# Altium PCB MB102_Upgrade.PcbDoc (part 1 of 2)
Units mil, origin at the board's own origin, x right, y up, seen from the top; angles counter-clockwise.
Board outline 2090.55 x 1299.23 mil, 2 copper layers (Top Layer, Bottom Layer), stack 65.792 mil thick; 81 components, 43 nets, 229 pads, 117 vias.
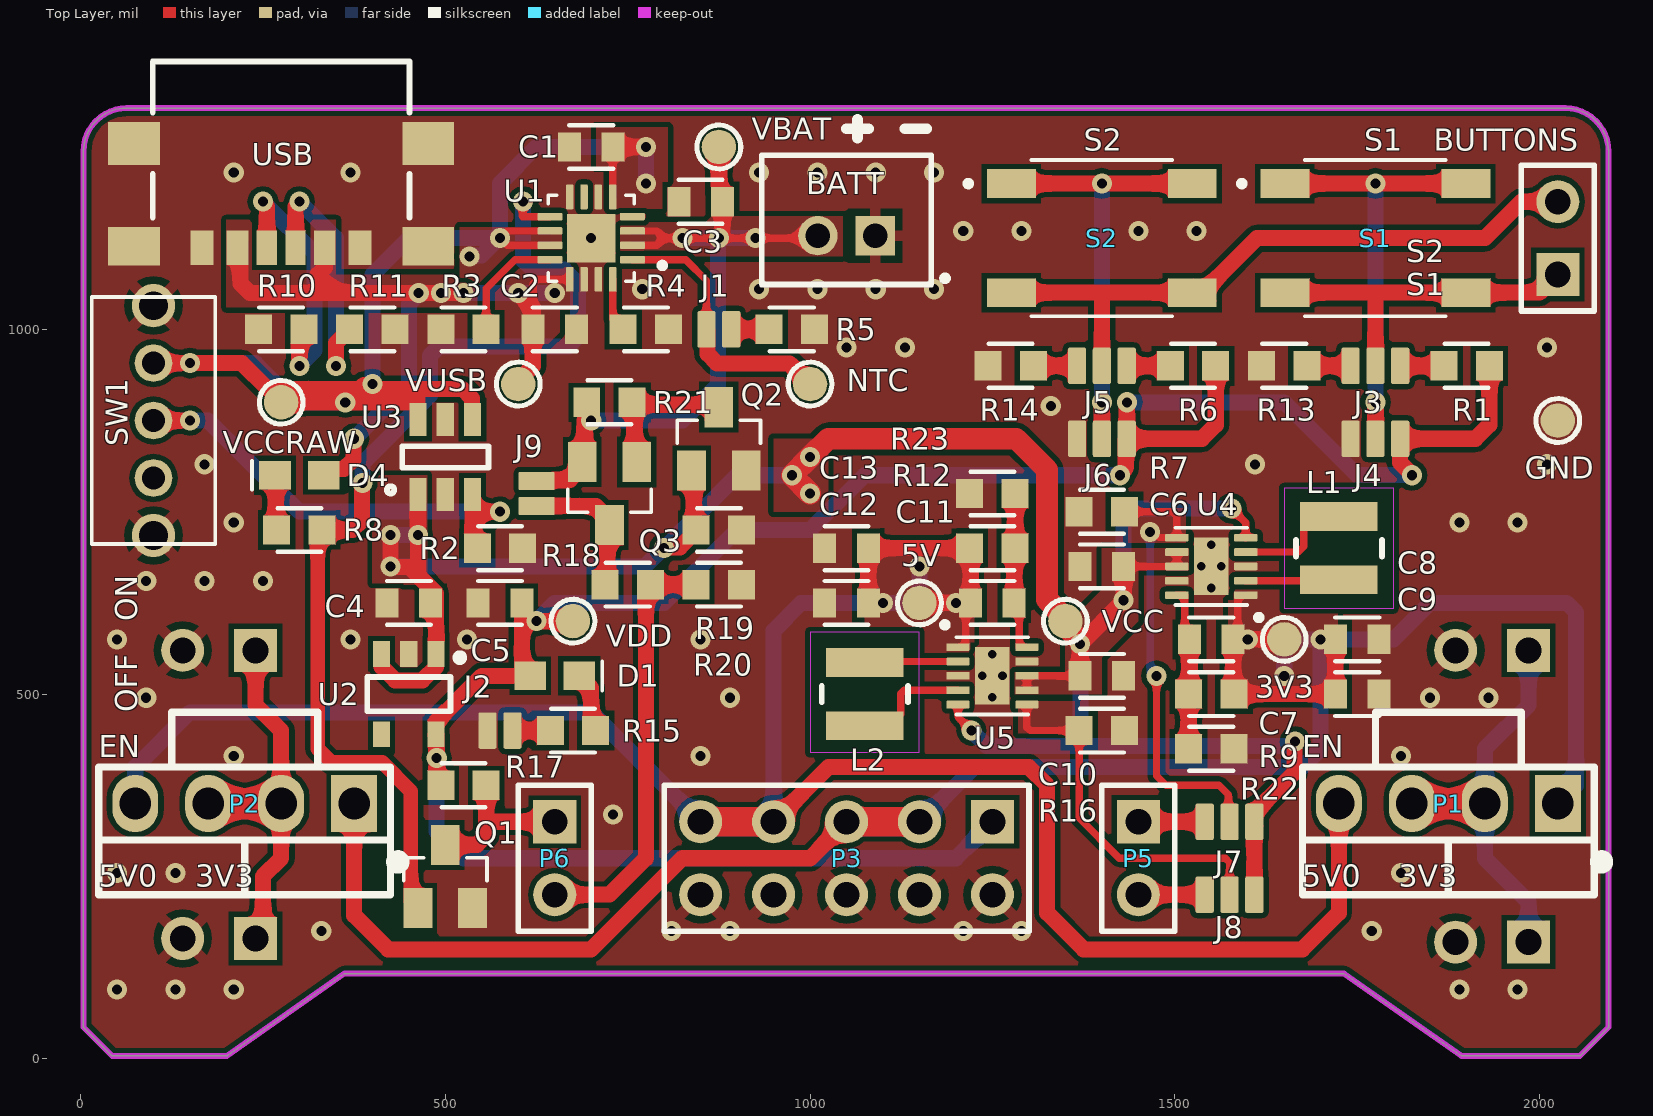
[diagram p0: Top Layer view]
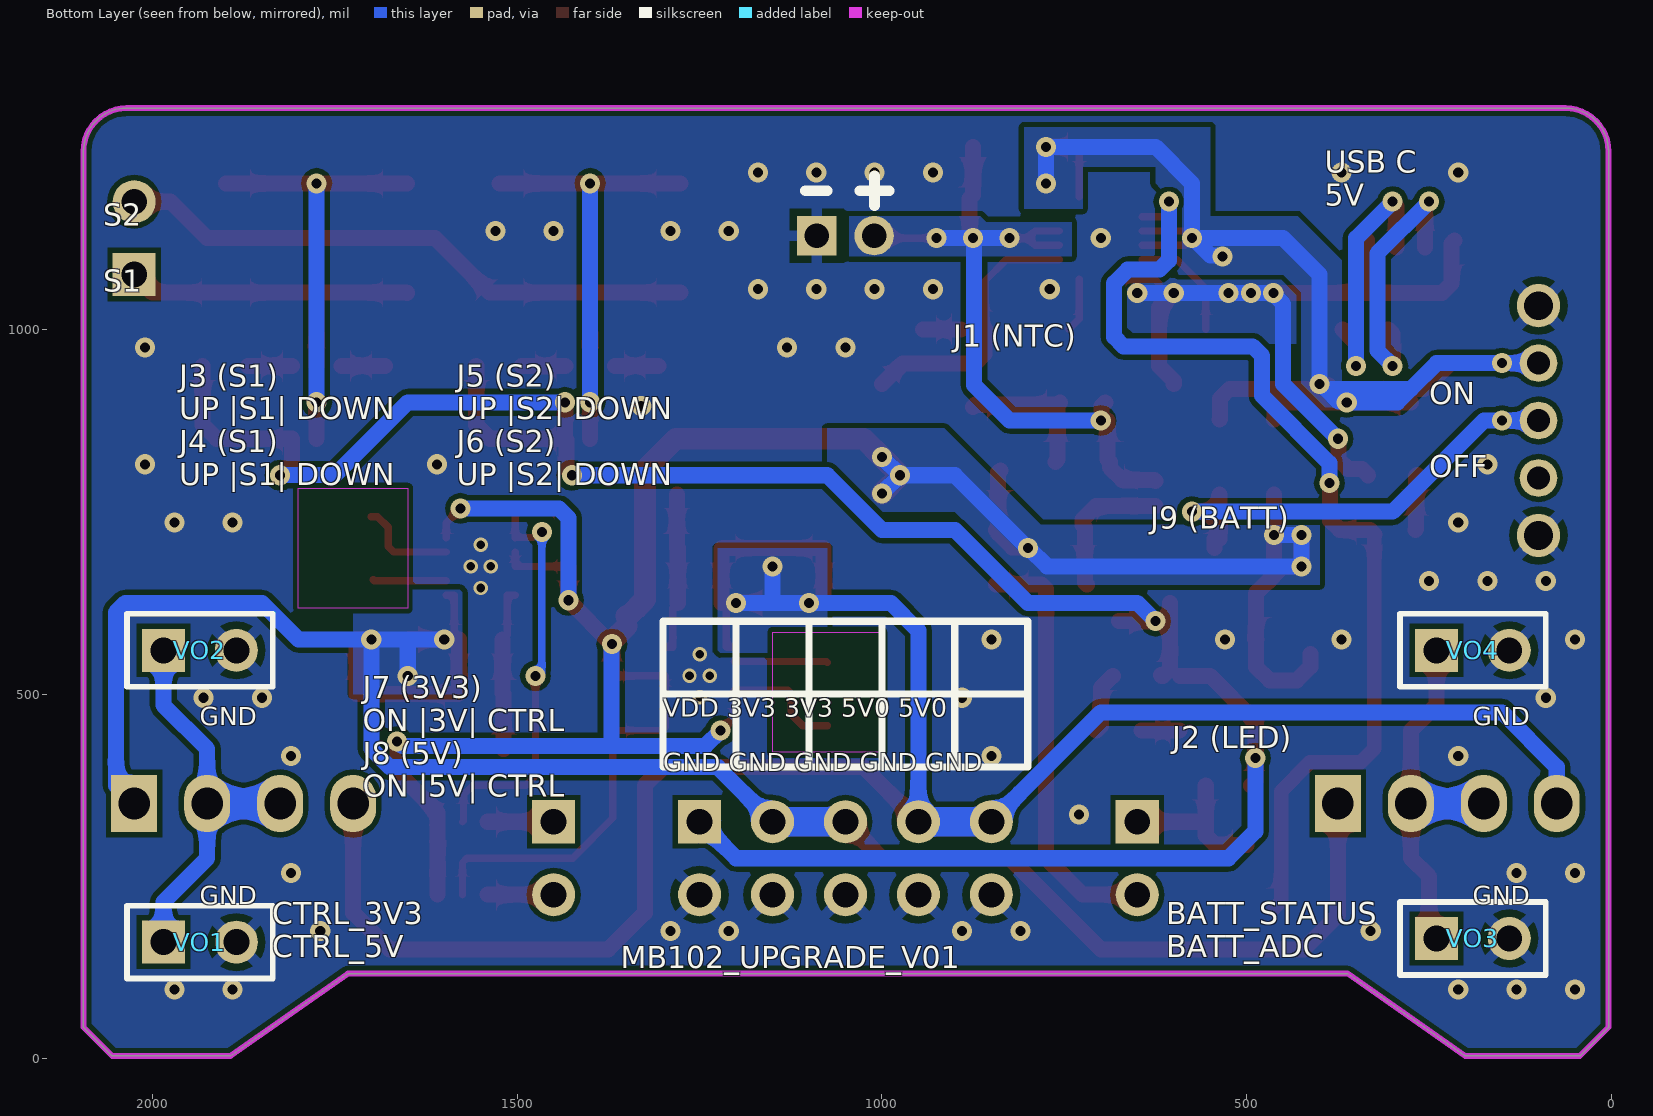
[diagram p1: Bottom Layer view, seen from below]
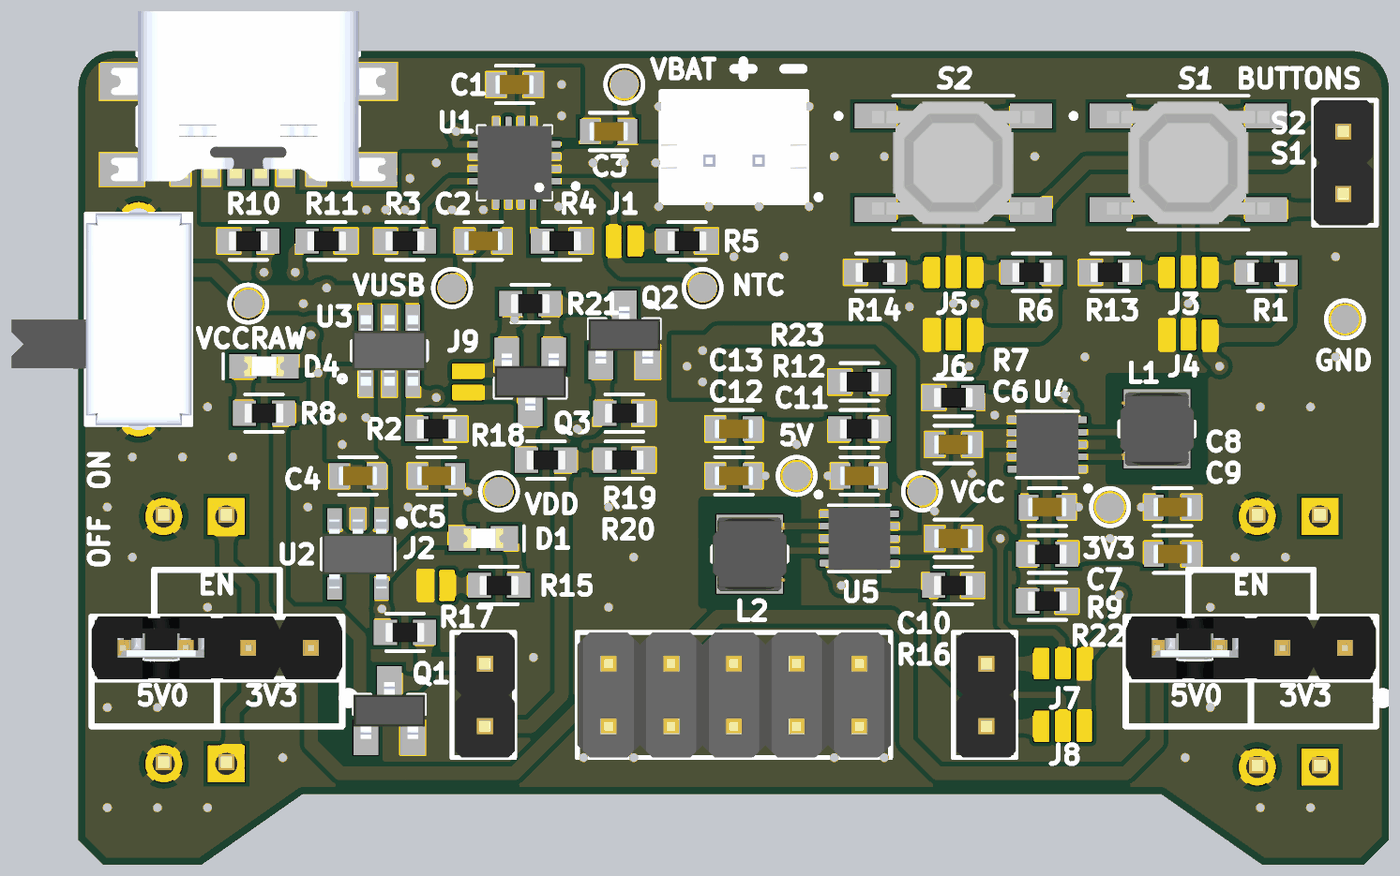
[diagram p2: 3D render of the assembled board from above, using the file's embedded part models]
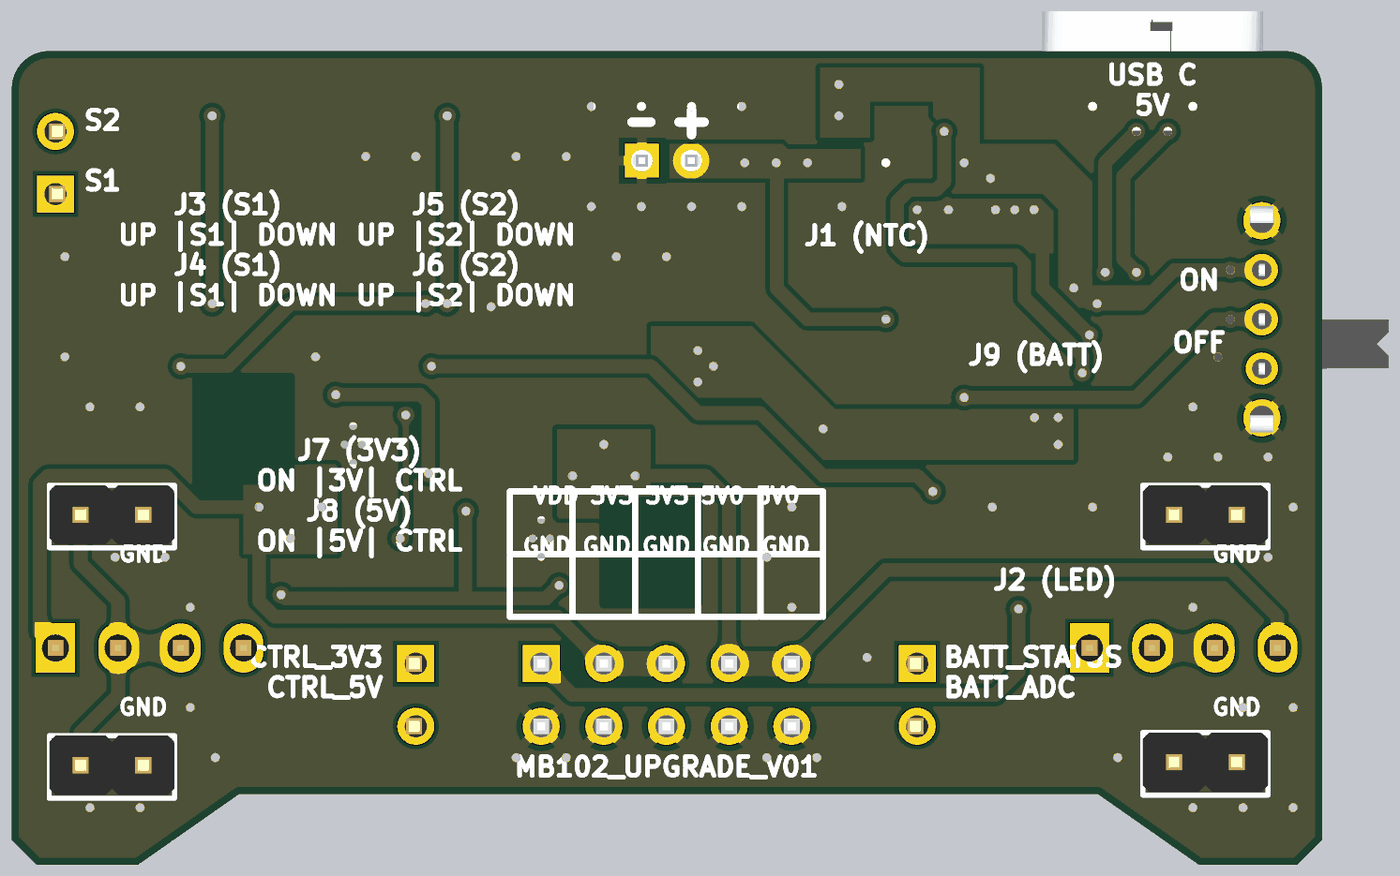
[diagram p3: 3D render of the assembled board from below, using the file's embedded part models]

## Layer stack, top to bottom
Top Solder: solder mask 0.4, Solder Resist, Dk 3.5
Top Layer: signal copper 1.4
Dielectric 1: dielectric 62.9921, FR-4, Dk 4.8
Bottom Layer: signal copper 1.4
Bottom Solder: solder mask 0.4, Solder Resist, Dk 3.5

## Board outline
4,43.37 43.37,4 200.43,4 361.68,116.91 1731.86,116.91 1893.11,4 2055.18,4 2094.55,43.37 2094.55,1244.17 ccw(c2035.5,1244.18) 2035.51,1303.23 63.07,1303.21 ccw(c63.06,1244.17) 4.02,1244.17

## Design rules (kind name [scope] priority, off if disabled: settings)
Clearance Clearance_RF [InNetClass('RF')] p1: gap=6 ignorepadtopadclearanceinfootprint=TRUE
Clearance [All] p2: gap=7 ignorepadtopadclearanceinfootprint=TRUE
HoleSize [All] p1: absolutevalues=TRUE maxlimit=200 minlimit=1 maxpercent=80.000 minpercent=20.000
MinimumSolderMaskSliver [All] p1: minsoldermaskwidth=2
PolygonConnect GND_Planes [InNet('GND') vs (InNet('GND') OR InNet('GND'))] p1: thpad.connectstyle=Relief thpad.reliefconductorwidth=15 thpad.reliefentries=4 thpad.polygonreliefangle="90 Angle" thpad.airgapwidth=10 thpad.conductorbypadedge=TRUE thpad.mindistance=15 thpad.enablemindistance=FALSE smdpad.connectstyle=Direct smdpad.reliefconductorwidth=20 smdpad.reliefentries=4 smdpad.polygonreliefangle="90 Angle" smdpad.airgapwidth=10 via.connectstyle=Direct via.reliefconductorwidth=10 via.reliefentries=4 via.polygonreliefangle="90 Angle" via.airgapwidth=10
PolygonConnect [All] p2: connectstyle=Direct reliefconductorwidth=10 reliefentries=4 polygonreliefangle="90 Angle" airgapwidth=10
RoutingVias [All] p1: holewidth=13.78 width=27.56 viastyle="Through Hole" minholewidth=11.81 minwidth=25.59 maxholewidth=19.68 maxwidth=33.46
ShortCircuit "Schematic Short-Circuit Constraint_2" [InComponent('J9')] p1: allowed=TRUE
ShortCircuit "Schematic Short-Circuit Constraint_1" [InComponent('J2')] p2: allowed=TRUE
ShortCircuit "Schematic Short-Circuit Constraint" [InComponent('J1')] p3: allowed=TRUE
ShortCircuit [All] p4: allowed=FALSE
SilkToSilkClearance [All] p1: silktosilkclearance=1
SilkToSolderMaskClearance [IsPad] p1: minsilkscreentomaskgap=1 clearancetoexposedcopper=TRUE
SolderMaskExpansion [All] p1: expansion=2 istentingtop=FALSE
Width Width_RF [InNetClass('RF')] p1: maxlimit=38 minlimit=8 preferedwidth=38
Width [All] p2: maxlimit=40 minlimit=8 preferedwidth=10
25 further rules are at their usual default settings.

## Classes and differential pairs
component class SwitchingRegulators: 3V3 5V C6 C7 C8 C9 C10 C11 C12 C13 J7 J8 L1 L2 R2 R7 R9 R12 R16 R22 R23 SW1 U3 U4 U5 VCC
component class PowerSchematic: BATT C1 C2 C3 C4 C5 D1 D4 GND J1 J2 J3 J4 J5 J6 J9 NTC Q1 Q2 Q3 R1 R3 R4 R5 R6 R8 R10 R11 R13 R14 R15 R17 R18 R19 R20 R21 S1 S2 U1 U2 USB VBAT VCCRAW VDD VUSB
component class Peripherals: P1 P2 P3 P5 P6 VO1 VO2 VO3 VO4

## Components (designator, comment, footprint, x,y, rotation, side; value= is the part's Value field where it differs from the comment)
3V3 "Test point 1.2mm" TEST_POINT_1.2MM 1650,575 r0 top
5V "Test point 1.2mm" TEST_POINT_1.2MM 1150,625 r0 top
BATT "JST-PH 2-Pin" JST_B2B-PH-K-S(LF)(SN) 1050,1150 r0 top locked
BUTTONS "Header 2" HDR1X2 2025,1075 r90 top
C1 "4.7uF/16V" C0603 700,1250 r180 top value=4.7uF
C2 "1uF/16V" C0603 650,1000 r0 top
C3 "4.7uF/16V" C0603 850,1175 r180 top value=4.7uF
C4 "10uF/10V" C0603 450,625 r180 top
C5 "10uF/10V" C0603 575,625 r180 top
C6 "4.7uF/16V" C0603 1400,675 r180 top value=4.7uF
C7 "100pF/50V" C0603 1550,575 r180 top
C8 "10uF/16V" C0603 1750,575 r0 top
C9 "4.7uF/16V" C0603 1750,500 r0 top value=4.7uF
C10 "4.7uF/16V" C0603 1400,525 r0 top value=4.7uF
C11 "100pF/50V" C0603 1250,625 r0 top
C12 "10uF/16V" C0603 1050,625 r180 top
C13 "4.7uF/16V" C0603 1050,700 r180 top value=4.7uF
D1 "RED" "LED 0603" 650,525 r0 top
D4 "GREEN" "LED 0603" 300,800 r180 top
GND "Test point 1.2mm" TEST_POINT_1.2MM 2025,875 r0 top
J1 "SMD NO" JUMPER_SMD_NO 875,1000 r0 top net-tie
J2 "SMD NO" JUMPER_SMD_NO 575,450 r180 top net-tie
J3 "SMD NO" JUMPER_SMD_NO_2WAY 1775,950 r0 top net-tie
J4 "SMD NO" JUMPER_SMD_NO_2WAY 1775,850 r0 top net-tie
J5 "SMD NO" JUMPER_SMD_NO_2WAY 1400,950 r0 top net-tie
J6 "SMD NO" JUMPER_SMD_NO_2WAY 1400,850 r0 top net-tie
J7 "SMD NO" JUMPER_SMD_NO_2WAY 1575,325 r0 top net-tie
J8 "SMD NO" JUMPER_SMD_NO_2WAY 1575,225 r0 top net-tie
J9 "SMD NO" JUMPER_SMD_NO 625,775 r270 top net-tie
L1 "1.5uH/1.7A" L3030_SHIELD_H15 1725,700 r270 top
L2 "1.5uH/1.7A" L3030_SHIELD_H15 1075,500 r90 top
NTC "Test point 1.2mm" TEST_POINT_1.2MM 1000,925 r0 top
P1 "Header Male 1x04 Jumper" "Header 1x04 Jumper" 1875,350 r270 top
P2 "Header Male 1x04 Jumper" "Header 1x04 Jumper" 225,350 r270 top
P3 "Header 5X2" HDR2X5 1250,325 r180 top locked
P5 "Header 2" HDR1X2 1450,325 r270 top locked
P6 "Header 2" HDR1X2 650,325 r270 top locked
Q1 "300mA/60V" SOT-23-3 500,250 r0 top
Q2 "300mA/60V" SOT-23-3 875,850 r0 top
Q3 "5A/30V/2.5V" SOT-23-3 725,775 r180 top
R1 "100K" R0603 1900,950 r0 top
R2 "1M" R0603 575,700 r180 top
R3 "1.2K" R0603 525,1000 r0 top
R4 "1.5K" R0603 775,1000 r180 top
R5 "10K" R0603 975,1000 r180 top value=10kR
R6 "100K" R0603 1525,950 r0 top
R7 "100K" R0603 1400,750 r0 top
R8 "1.2K" R0603 300,725 r180 top
R9 "220K" R0603 1550,500 r0 top
R10 "5.1K" R0603 275,1000 r0 top
R11 "5.1K" R0603 400,1000 r180 top
R12 "220K" R0603 1250,700 r180 top
R13 "100K" R0603 1650,950 r0 top
R14 "100K" R0603 1275,950 r0 top
R15 "1.2K" R0603 675,450 r0 top
R16 "100K" R0603 1400,450 r180 top
R17 "100K" R0603 525,375 r180 top
R18 "510K" R0603 750,650 r180 top
R19 "100K" R0603 875,725 r180 top
R20 "510K" R0603 875,650 r180 top
R21 "10K" R0603 725,900 r180 top value=10kR
R22 "1M" R0603 1550,425 r180 top
R23 "2M" R0603 1250,775 r0 top
S1 "8-1437565-1" SW_8-1437565-1 1775,1125 r0 top locked
S2 "8-1437565-1" SW_8-1437565-1 1400,1125 r0 top locked
SW1 "1825232-1" 1825232-1 100,875 r270 top locked
U1 "BQ24075RGTR" VQFN16 700,1125 r180 top locked
U2 "AP2112K-3.3TRG1" SOT-25-5 450,500 r270 top locked
U3 "AP2281-1WG-7" SOT-26-6 500,825 r90 top locked
U4 "TPS63030" WSON-N10 1550,675 r180 top
U5 "TPS63030" WSON-N10 1250,525 r0 top
USB "USB4135-GF-A_REVA" "GCT_USB4135 16-pin" 275,1255 r180 top locked
VBAT "Test point 1.2mm" TEST_POINT_1.2MM 875,1250 r0 top
VCC "Test point 1.2mm" TEST_POINT_1.2MM 1350,600 r0 top
VCCRAW "Test point 1.2mm" TEST_POINT_1.2MM 275,900 r90 top
VDD "Test point 1.2mm" TEST_POINT_1.2MM 675,600 r0 top
VO1 "Header 2" HDR1X2 1985,160 r180 bottom locked
VO2 "Header 2" HDR1X2 1985,560 r180 bottom locked
VO3 "Header 2" HDR1X2 240,165 r180 bottom locked
VO4 "Header 2" HDR1X2 240,560 r180 bottom locked
VUSB "Test point 1.2mm" TEST_POINT_1.2MM 600,925 r0 top

## Footprints (in the part's own frame and the unit in brackets; to place one, negate y for a bottom-side part, rotate by r counter-clockwise, add the part's x,y. Pads: shape width x height; smd on the part's side, far side on the other; paste and mask are expansions set on the pad)
1825232-1 [mm]
  round 1.308 hole 0.8: 1(-2,0) 2(0,0) 3(2,0)
  round 1.508 hole 1: MH1(-4,0) MH2(4,0)
  silkscreen extent -4.3,-2.15 4.3,2.15, body extent -4.59,-5.15 4.59,2.15, height 3.5
C0603 [mm]
  rect 0.8x1.02 smd: 1(-0.759,0) 2(0.759,0)
  silkscreen extent -0.76,-0.76 0.76,0.76, body extent -0.8,-0.4 0.8,0.4, height 0.81
"GCT_USB4135 16-pin" [mm]
  rect 0.7x1.2 smd: A5(-0.5,3.635) B5(0.5,3.635)
  rect 0.76x1.2 smd: A9(1.52,3.635) B9(-1.52,3.635)
  rect 0.8x1.2 smd: A12(2.75,3.635) B12(-2.75,3.635)
  rect 1.8x1.35 smd: S1(-5.125,3.58) S4(5.125,3.58)
  rect 1.8x1.5 smd: S2(-5.125,0) S3(5.125,0)
  silkscreen extent -4.47,-2.85 4.47,2.59, body extent -5.57,-2.85 5.57,4.05, height 3.25
HDR1X2 [mm] "Connector; Header; 2 Position"
  rect 1.5x1.5 hole 0.9: 1(0,0)
  round 1.5 hole 0.9: 2(2.54,0)
  silkscreen extent -1.27,-1.27 3.81,1.27, body extent -1.27,-1.13 3.81,1.27, height 8.31
HDR2X5 [mm] "Connector; Header; 5x2 Position"
  rect 1.5x1.5 hole 0.9: 1(0,0)
  round 1.5 hole 0.9: 2(0,2.54) 3(2.54,0) 4(2.54,2.54) 5(5.08,0) 6(5.08,2.54) 7(7.62,0) 8(7.62,2.54) 9(10.16,0) 10(10.16,2.54)
  silkscreen extent -1.27,-1.27 11.43,3.81, body extent -1.27,-1.27 11.43,3.81, height 8.35
"Header 1x04 Jumper" [mm]
  rect 2x1.6 hole 1.1: 1(0,3.81)
  oval 2x1.6 hole 1.1: 2(0,1.27) 3(0,-1.27) 4(0,-3.81)
  silkscreen extent -1.27,-5.08 2.24,5.54, body extent -1.27,-5.08 1.27,5.08, height 9
JST_B2B-PH-K-S(LF)(SN) [mm]
  rect 1.368x1.368 hole 0.86: 1(1,-0.55)
  round 1.368 hole 0.86: 2(-1,-0.55)
  silkscreen extent -2.95,-2.25 3.53,2.25, body extent -2.95,-2.25 2.95,2.25, height 6.01
JUMPER_SMD_NO [mil]
  rrect20% 25x50 smd paste-99999: 1(-17,0) 2(17,0)
JUMPER_SMD_NO_2WAY [mil]
  rrect20% 25x50 smd paste-99999: 1(-34,0) 2(0,0) 3(34,0)
L3030_SHIELD_H15 [mm] "Shielded L=30 W=30 H=15"
  rect 1x2.7 smd: 1(-1.1,0) 2(1.1,0)
  silkscreen extent -0.29,-1.5 0.29,1.5, body extent -1.5,-1.5 1.5,1.5, height 1.5
"LED 0603" [mm]
  rect 1.1x1 smd: 1(-0.85,0) 2(0.85,0)
  silkscreen extent 1.65,-0.51 1.65,0.51, body extent -0.8,-0.4 0.8,0.4, height 0.4
R0603 [mm]
  rect 0.94x1.02 smd: 1(-0.79,0) 2(0.79,0)
  silkscreen extent -0.76,-0.76 0.76,0.76, body extent -0.8,-0.4 0.8,0.4, height 0.51
SOT-23-3 [mm]
  rect 1x1.4 smd: 1(-0.95,-1.1) 2(0.95,-1.1) 3(0,1.1)
  silkscreen extent -1.45,-0.15 1.45,0.65, body extent -1.45,-1.15 1.45,1.15, height 1.1
SOT-25-5 [mm]
  rect 0.9x0.6 smd: 1(-1.4,0.95) 2(-1.4,0) 3(-1.4,-0.95) 4(1.4,-0.95) 5(1.4,0.95)
  silkscreen extent -1.4,-1.45 0.6,1.9, body extent -1.4,-1.45 1.4,1.45, height 1.3
SOT-26-6 [mm]
  rect 1.15x0.6 smd: 1(-1.3,0.95) 2(-1.3,0) 3(-1.3,-0.95) 4(1.3,-0.95) 5(1.3,0) 6(1.3,0.95)
  silkscreen extent -1.27,-1.5 0.38,2.03, body extent -1.43,-1.5 1.43,1.5, height 1.4
SW_8-1437565-1 [mm]
  rect 1.7x1 smd: 1(-3.15,1.9) 2(3.15,1.9) 3(3.15,-1.9) 4(-3.15,-1.9)
  silkscreen extent -4.75,-2.72 2.45,2.72, body extent -3.3,-2.5 3.3,2.5, height 1.51
TEST_POINT_1.2MM [mm]
  round 1.2 smd paste-0.025: 1(0,0)
  silkscreen extent -0.76,-0.76 0.76,0.76
VQFN16 [mm]
  rrect25% 0.86x0.26 smd: 1(-1.435,0.75) 2(-1.435,0.25) 3(-1.435,-0.25) 4(-1.435,-0.75) 9(1.435,-0.75) 10(1.435,-0.25) 11(1.435,0.25) 12(1.435,0.75)
  rrect25% 0.26x0.86 smd: 5(-0.75,-1.435) 6(-0.25,-1.435) 7(0.25,-1.435) 8(0.75,-1.435) 13(0.75,1.435) 14(0.25,1.435) 15(-0.25,1.435) 16(-0.75,1.435)
  rect 1.68x1.68 smd paste-2: 17(0,0)
  silkscreen extent -2.57,-1.5 1.5,1.5, body extent -1.5,-1.5 1.5,1.5, height 1
WSON-N10 [mm] "WSON-N10 (With Vias)"
  rrect25% 0.81x0.27 smd: 1(-1.2,1) 2(-1.2,0.5) 3(-1.2,0) 4(-1.2,-0.5) 5(-1.2,-1) 6(1.2,-1) 7(1.2,-0.5) 8(1.2,0) 9(1.2,0.5) 10(1.2,1)
  rect 1.2x2 smd paste-2: 11(0,0)
  silkscreen extent -1.76,-1.35 1.25,1.88, body extent -1.25,-1.25 1.25,1.25, height 0.82

## Part data
3V3 5V GND NTC VBAT VCC VCCRAW VDD VUSB: library part "Test point", "SMD test point"
BATT: "JST (JAPAN SOLDERLESS TERMINALS) - B2B-PH-K-S(LF)(SN) - Pin Header, Top Entry, Wire-to-Board, 2 mm, 1 Rows, 2 Contacts, Through Hole, PH Series", Manufacturer=JST, Manufacturer Part Number=B2B-PH-K-S(LF)(SN), Supplier Part Number 1=C131337, Category=Connectors, Height=0.35inch, Length=0.2inch, Pricing 1="20=0.03960, 200=0.03310, 600=0.02840, 2000=0.02160, 10000=0.02100, 20000=0.02070 (USD)", RoHS=Yes, Stock 1=3352380, Supplier 1=LCSC, Weight=0.0625lb, Width=0.24inch
BUTTONS P5 P6 VO1 VO2 VO3 VO4: "Header, 2-Pin", LatestRevisionDate=17-Jul-2002, LatestRevisionNote="Re-released for DXP Platform.", Publisher="Altium Limited"
C1 C3: library part "C0603 4.7uF/16V", "0603 4.7 uF 16 V ±10% Tolerance X5R Multilayer Ceramic Capacitor", Case Code (Imperial)=0603, Case Code (Metric)=1608, Manufacturer=Murata, Manufacturer Part Number=GRT188R61C475KE13D, Max Operating Temperature=85°C, Min Operating Temperature=-55°C, Ratings=AEC-Q200, Supplier Part Number 1=81-GRT188R61C475KE3D, Tolerance=10%, Voltage Rating=16V, Case/Package=0603, Category="Ceramic Capacitors", Length=0.063inch, Mounting Technology="Surface Mount", Packaging="Cut Tape", Pricing 1="1=0.16, 10=0.066, 50=0.066, 100=0.038, 1000=0.034, 10000=0.029 (USD)", RoHS=Yes, RoHS Compliant=Yes, Series=GRT, Stock 1=39950, Supplier 1=Mouser, Thickness=0.035inch, Width=0.031inch
C2: library part "C0603 1uF/16V X5R", "MLCC 1uF 16V X5R 10% SMD 0603 85C Paper T/R", Capacitance=1uF, Case Code (Imperial)=0603, Case Code (Metric)=1608, Dielectric=X5R, Manufacturer=Yageo, Manufacturer Part Number=CC0603KRX5R7BB105, Max Operating Temperature=85°C, Min Operating Temperature=-55°C, Package Quantity=4000, Resistor Type=Ceramic, Supplier Part Number 1=603-CC603KRX5R7BB105, Tolerance=10%, Voltage Rating=16V, Case/Package=0603, Category="Ceramic Capacitors", Construction=Flat, Depth=0.8mm, Dissipation Factor=7%, Halogen Free="Halogen Free", Height=0.8mm, Lead Free="Lead Free", Length=1.6mm, Mount="Surface Mount", Number of Pins=2, Packaging="Tape and Reel", Pricing 1="1=0.17000, 10=0.09100, 50=0.09100, 100=0.04100, 1000=0.03400, 10000=0.02100 (USD)", Radiation Hardening=No, REACH SVHC=Unknown, RoHS=Yes, RoHS Compliant=Yes, Series=CC, Stock 1=726921, Supplier 1=Mouser, Termination=SMD/SMT, Thickness=0.035inch, Voltage Rating (DC)=16V, Width=0.8mm
C4 C5: library part "C0603 10uF/10V", "MLCC 10uF 10V X5R 20% 0603", Manufacturer=Samsung, Manufacturer Part Number=CL10A106MP8NNND, Supplier Part Number 1=187-CL10A106MP8NNND, Category="Ceramic Capacitors", Pricing 1="1=0.20000, 10=0.14000, 50=0.14000, 100=0.06600, 1000=0.03900, 10000=0.03000 (USD)", RoHS=Yes, RoHS Compliant=Yes, Stock 1=58774, Supplier 1=Mouser, Supplier 2=Mouser, Supplier Part Number 2=963-LMK107BBJ106MAHT
C6 C9 C10 C13: library part "C0603 4.7uF/16V", "MLCC 0603 4.7uF 16V 10% X5R", Case Code (Imperial)=0603, Case Code (Metric)=1608, Manufacturer 1=Murata, Manufacturer Part Number 1=GRT188R61C475KE13D, Max Operating Temperature=85°C, Min Operating Temperature=-55°C, Ratings=AEC-Q200, Supplier Part Number 1=81-GRT188R61C475KE3D, Tolerance=10%, Voltage Rating=16V, Case/Package=0603, Category="Ceramic Capacitors", Length=0.063inch, Mounting Technology="Surface Mount", Packaging="Cut Tape", Pricing 1="1=0.16, 10=0.066, 50=0.066, 100=0.038, 1000=0.034, 10000=0.029 (USD)", RoHS=Yes, RoHS Compliant=Yes, Series=GRT, Stock 1=39950, Supplier 1=Mouser, Thickness=0.035inch, Width=0.031inch
C7 C11: library part "C0603 100pF/50V", "AVX - 06035A101JAT2A - SMD Multilayer Ceramic Capacitor, 100 pF, 5%, C0G / NP0, 50 V, 0603 [1608 Metric] RoHS Compliant: Yes", Capacitance=100pF, Case Code (Imperial)=0603, Case Code (Metric)=1608, Dielectric=C0G, Insulation Resistance=100GR, Manufacturer="Kyocera AVX", Manufacturer Part Number=06035A101JAT2A, Max Operating Temperature=125°C, Min Operating Temperature=-55°C, Package Quantity=1, Supplier Part Number 1=581-06035A101J, Temperature Coefficient=30ppm/°C, Tolerance=5%, Voltage=50V, Case/Package=0603, Category="Ceramic Capacitors", Depth=0.81mm, Height=0.9mm, Lead Free="Lead Free", Length=1.6mm, Mount="Surface Mount,PCB", Number of Pins=2, Packaging="Tape and Reel", Pricing 1="1=0.10000, 10=0.04100, 50=0.04100, 100=0.03300, 1000=0.01900, 10000=0.01200 (USD)", Radiation Hardening=No, REACH SVHC="No SVHC", RoHS=Yes, RoHS Compliant=Yes, Stock 1=438925, Supplier 1=Mouser, Supplier 2=Mouser, Supplier Part Number 2=77-VJ0603A101JXAAC, Termination=SMD/SMT, Thickness=0.035inch, Voltage Rating=50V, Voltage Rating (DC)=50V, Width=0.032inch
C8 C12: library part "C0603 10uF/16V", "MLCC 0603 10uF 16V 20% X5R", Capacitance=10uF, Case Code (Imperial)=0603, Case Code (Metric)=1608, Manufacturer 1=Murata, Manufacturer Part Number 1=GRM188R61C106MAALD, Max Operating Temperature=85°C, Min Operating Temperature=-55°C, Supplier Part Number 1=81-GRM188R61C106MALD, Tolerance=20%, Voltage Rating=16V, Case/Package=0603, Category="Ceramic Capacitors", Height=0.8mm, Lead Free="Lead Free", Length=0.063inch, Material=Ceramic, Mount="Surface Mount", Packaging="Cut Tape", Pricing 1="1=0.38000, 10=0.27100, 50=0.27100, 100=0.16200, 1000=0.10300, 10000=0.08800 (USD)", RoHS=Yes, Stock 1=9439, Supplier 1=Mouser, Supplier 2=Mouser, Supplier 3=Mouser, Supplier Part Number 2=81-ZRB18AR61C106ME1L, Supplier Part Number 3=810-C1608X5R1C106M, Thickness=0.037inch, Voltage Rating (DC)=16V, Width=0.031inch
D1: library part "LED 0603 RED", "Red 625nm LED Indication - Discrete 2V 0603", Case Code (Imperial)=0603, Case Code (Metric)=1608, Color=Red, Forward Voltage=2V, Manufacturer="Wurth Electronics", Manufacturer Part Number=150060RS55040, Supplier Part Number 1=710-150060RS55040, Test Current=20mA, Case/Package=0603, Category=LEDs, Dominant Wavelength=624nm, Height=0.5mm, Length=1.6mm, Lens Size=0.8mm, Lens Style=Flat, Lens Transparency=Diffused, Luminous Intensity=90mcd, Mount="Surface Mount", Packaging="Tape and Reel", Pricing 1="1=0.18000, 10=0.16200, 100=0.14700, 500=0.13200, 1000=0.11700, 2000=0.11700 (USD)", RoHS=No, Stock 1=8586, Supplier 1=Mouser, Viewing Angle=140°, Width=0.8mm
D4: library part "LED 0603 GREEN", "Green 575nm LED Indication - Discrete 2V 0603", Case Code (Imperial)=0603, Case Code (Metric)=1608, Color=Green, Forward Voltage=2V, Manufacturer="Wurth Electronics", Manufacturer Part Number=150060VS55040, Supplier Part Number 1=710-150060VS55040, Test Current=20mA, Case/Package=0603, Category=LEDs, Dominant Wavelength=573nm, Height=0.5mm, Length=1.6mm, Lens Size=0.8mm, Lens Style=Flat, Lens Transparency=Diffused, Luminous Intensity=60mcd, Mount="Surface Mount", Packaging="Cut Tape", Pricing 1="1=0,18000, 10=0,16200, 50=0,16200, 100=0,14700, 1000=0,11700, 10000=0,11700 (USD)", RoHS=No, Stock 1=24940, Supplier 1=Mouser, Viewing Angle=140°, Width=0.8mm
J1 J2 J9: library part JUMPER_SMD_NO, Rule="Short-Circuit Constraint [Short Circuit - Allowed]"
J3 J4 J5 J6 J7 J8: library part JUMPER_SMD_NO_2WAY
L1 L2: library part MPIT3015-1R5N-LF, "Inductor Power Shielded Wirewound 1.5uH 20% 152MHz Metal 2.3A 0.05Ohm DCR 1212 T/R", Manufacturer 1=microgate, Supplier Part Number 1=C486478, Category="Fixed Inductors", Manufacturer Part Number 1=MPIT3015-1R5N-LF, RoHS=Yes, Supplier 1=LCSC
P1 P2: library part "Header Male Jumper 1x04", "Header Male Jumper 1x04"
P3: "Header, 5-Pin, Dual row", LatestRevisionDate=17-Jul-2002, LatestRevisionNote="Re-released for DXP Platform.", Publisher="Altium Limited"
Q1 Q2: library part "MOSFET N-CH 2N7002,215", "Trans MOSFET N-CH 60V 0.3A 3-Pin TO-236AB T/R", Manufacturer=Nexperia, Manufacturer Part Number=2N7002,215, Supplier Part Number 1=771-2N7002-T/R, Category=MOSFETs, Pricing 1="1=0.16000, 10=0.13800, 100=0.05900, 500=0.04800, 1000=0.03300, 3000=0.02500, 9000=0.02200, 24000=0.02000, 45000=0.01500 (USD)", RoHS=No, Stock 1=82531, Supplier 1=Mouser
Q3: library part "MOSFET P-CH 30V/5A SI2347DS-T1-GE3", "P-Channel 30 V 42 mOhm 22 nC Surface Mount Power Mosfet - SOT-23-3", Case/Package=SOT-23-3, Continuous Drain Current (ID)=3.8A, Drain to Source Breakdown Voltage=-30V, Drain to Source Resistance=68mR, Drain to Source Voltage (Vdss)=30V, Gate to Source Voltage (Vgs)=20V, Input Capacitance=705pF, Manufacturer="Vishay Semiconductors", Manufacturer Part Number=Si2347DS-T1-GE3, Max Operating Temperature=150°C, Max Power Dissipation=1.7W, Min Operating Temperature=-55°C, Package Quantity=3000, Supplier Part Number 1=78-SI2347DS-T1-GE3, Threshold Voltage=-2.5V, Category=MOSFETs, Contact Plating=Tin,Matte, Element Configuration=Single, Fall Time=9ns, Lead Free="Lead Free", Mount="Surface Mount", Number of Elements=1, Number of Pins=3, Packaging="Tape and Reel", Polarity=P-CHANNEL, Power Dissipation=1.7W, Pricing 1="1=0.41000, 10=0.27600, 50=0.27600, 100=0.14500, 1000=0.10000, 10000=0.07700 (USD)", Radiation Hardening=No, Rds On Max=42mR, REACH SVHC="No SVHC", Rise Time=6ns, RoHS=Yes, RoHS Compliant=Yes, Series=TrenchFET®, Stock 1=90370, Supplier 1=Mouser, Turn-Off Delay Time=19ns
R1 R6 R7 R13 R14 R16 R17 R19: library part "R0603 100K", "RES 0603 100K OHM 1% 1/10W", Case Code (Imperial)=0603, Case Code (Metric)=1608, Manufacturer=Yageo, Manufacturer Part Number=RC0603FR-07100KL, Max Operating Temperature=155°C, Min Operating Temperature=-55°C, Power Rating=100mW, Resistance=100kR, Resistor Type="Thick Film", Supplier Part Number 1=603-RC0603FR-07100KL, Temperature Coefficient=100ppm/°C, Tolerance=1%, Voltage Rating=50V, Working Voltage=75V, Case/Package=0603, Category="Chip SMD Resistors", Depth=0.8mm, Height=0.45mm, Lead Free="Lead Free", Length=1.6mm, Military Standard=Not, Number of Pins=2, Number of Terminations=2, Packaging="Tape and Reel", Pricing 1="1=0.10000, 10=0.02100, 100=0.00900, 1000=0.00400, 5000=0.00300, 10000=0.00200 (USD)", REACH SVHC="No SVHC", RoHS=Yes, Stock 1=4536807, Supplier 1=Mouser, Termination=SMD/SMT, Voltage Rating (DC)=50V, Width=0.8mm
R2: library part "R0603 1M", "RES SMD 1M OHM 1% 1/10W 0603", Case Code (Imperial)=0603, Case Code (Metric)=1608, Manufacturer=Yageo, Manufacturer Part Number=RC0603FR-071ML, Max Operating Temperature=155°C, Min Operating Temperature=-55°C, Package Quantity=5000, Power Rating=100mW, Resistance=1MR, Resistor Type="Thick Film", Supplier Part Number 1=603-RC0603FR-071ML, Temperature Coefficient=100ppm/°C, Tolerance=1%, Voltage Rating=75V, Voltage Rating (DC)=50V, Application(s)="HIGH RELIABILITY", Case/Package=0603, Category="Chip SMD Resistors", Depth=0.8mm, Height=0.45mm, Lead Free="Lead Free", Length=1.6mm, Military Standard=Not, Number of Pins=2, Packaging="Cut Tape", Pricing 1="1=0.10000, 10=0.01800, 50=0.01800, 100=0.00700, 1000=0.00400, 10000=0.00200 (USD)", REACH SVHC="No SVHC", RoHS=Yes, RoHS Compliant=Yes, Series=RC, Stock 1=1321822, Supplier 1=Mouser, Technology="THICK FILM", Termination=SMD/SMT, Type="General Purpose", Weight=0.000847oz, Width=0.8mm
R3 R8 R15: library part "R0603 1.2K", "RES 0603 1.2K OHM 1% 1/10W", Case Code (Imperial)=0603, Case Code (Metric)=1608, Manufacturer=Yageo, Manufacturer Part Number=RC0603FR-071K2L, Max Operating Temperature=155°C, Max Power Dissipation=100mW, Min Operating Temperature=-55°C, Resistance=1.2kR, Resistance Tolerance=1%, Resistor Type="Thick Film", Supplier Part Number 1=603-RC0603FR-071K2L, Temperature Coefficient=100ppm/°C, Voltage Rating=50V, Case/Package=0603, Category="Chip SMD Resistors", ComponentLink1Description=http://www.farnell.com/datasheets/443971.pdf?src-supplier=Farnell, ComponentLink1URL=http://www.farnell.com/datasheets/443971.pdf?src-supplier=Farnell, ComponentLink2Description=http://www.farnell.com/datasheets/1868787.pdf?src-supplier=Farnell, ComponentLink2URL=http://www.farnell.com/datasheets/1868787.pdf?src-supplier=Farnell, ComponentLink3Description=http://www.farnell.com/datasheets/2167052.pdf?src-supplier=Farnell, ComponentLink3URL=http://www.farnell.com/datasheets/2167052.pdf?src-supplier=Farnell, ComponentLink4Description=http://www.mouser.com/ds/2/447/RC0603-272842.pdf?src-supplier=Mouser, ComponentLink4URL=http://www.mouser.com/ds/2/447/RC0603-272842.pdf?src-supplier=Mouser, ComponentLink5Description=http://components.arrow.com/part/dataview/0323_00047720?src-supplier=Arrow+Europe, ComponentLink5URL=http://components.arrow.com/part/dataview/0323_00047720?src-supplier=Arrow+Europe, ComponentLink6Description=http://www.farnell.com/datasheets/443971.pdf?src-supplier=Element14, ComponentLink6URL=http://www.farnell.com/datasheets/443971.pdf?src-supplier=Element14, ComponentLink7Description=http://www.farnell.com/datasheets/2167052.pdf?src-supplier=Newark, ComponentLink7URL=http://www.farnell.com/datasheets/2167052.pdf?src-supplier=Newark, ComponentLink8Description=http://www.farnell.com/datasheets/1868787.pdf?src-supplier=Element14, ComponentLink8URL=http://www.farnell.com/datasheets/1868787.pdf?src-supplier=Element14, ComponentLink9Description=http://www.farnell.com/datasheets/2167052.pdf?src-supplier=Element14, ComponentLink9URL=http://www.farnell.com/datasheets/2167052.pdf?src-supplier=Element14, ComponentLink10Description=http://www.yageo.com/documents/recent/PYu-RC0603_51_RoHS_L_7.pdf?src-supplier=Future+Electronics, ComponentLink10URL=http://www.yageo.com/documents/recent/PYu-RC0603_51_RoHS_L_7.pdf?src-supplier=Future+Electronics, ComponentLink11Description=https://www.verical.com/server-webapp/html/getDatasheet?partID=326670&src-supplier=Verical, ComponentLink11URL=https://www.verical.com/server-webapp/html/getDatasheet?partID=326670&src-supplier=Verical, ComponentLink12Description=http://www.farnell.com/datasheets/1868787.pdf?src-supplier=Newark, ComponentLink12URL=http://www.farnell.com/datasheets/1868787.pdf?src-supplier=Newark, ComponentLink13Description=http://www.yageo.com/documents/recent/PYu-RC_Group_51_RoHS_L_9.pdf?src-supplier=Digi-Key, ComponentLink13URL=http://www.yageo.com/documents/recent/PYu-RC_Group_51_RoHS_L_9.pdf?src-supplier=Digi-Key, ComponentLink14Description=http://www.yageo.com/documents/recent/PYu-RC_Group_51_RoHS_L_10.pdf?src-supplier=Digi-Key, ComponentLink14URL=http://www.yageo.com/documents/recent/PYu-RC_Group_51_RoHS_L_10.pdf?src-supplier=Digi-Key, Construction=Rectangular, Depth=0.8mm, Features="Moisture Resistant", Height=0.45mm, Lead Free="Lead Free", Length=1.6mm, Military Standard=Not, Number of Pins=2, Number of Terminations=2, Packaging="Tape and Reel", Power Rating=100mW, Pricing 1="1=0.10000, 10=0.02400, 50=0.02400, 100=0.01000, 1000=0.00400, 10000=0.00300 (USD)", REACH SVHC="No SVHC", RoHS=Yes, RoHS Compliant=Yes, Series=RC, Size Code=0603, Stock 1=27884, Supplier 1=Mouser, Termination=SMD/SMT, Tolerance=1%, Voltage Rating (DC)=50V, Width=0.8mm
R4: library part "R0603 1.5K", "RES 0603 1.5K OHM 0.5% 1/10W", Case Code (Imperial)=0603, Case Code (Metric)=1608, Manufacturer=Yageo, Manufacturer Part Number=RC0603FR-071K5L, Max Operating Temperature=155°C, Max Power Dissipation=100mW, Min Operating Temperature=-55°C, Package Quantity=1, Resistance=1.5kR, Resistor Type="Thick Film", Supplier Part Number 1=603-RC0603FR-071K5L, Temperature Coefficient=100ppm/°C, Tolerance=1%, Voltage Rating=50V, Case/Package=0603, Category="Chip SMD Resistors", Depth=0.8mm, Features="Moisture Resistant", Height=0.022inch, Lead Free="Lead Free", Length=0.063inch, Military Standard=Not, Number of Pins=2, Number of Terminations=2, Packaging="Tape and Reel", Power Rating=100mW, Pricing 1="1=0.10000, 10=0.01800, 50=0.01800, 100=0.00600, 1000=0.00500, 10000=0.00300 (USD)", REACH SVHC="No SVHC", RoHS=Yes, Stock 1=312486, Supplier 1=Mouser, Termination=SMD/SMT, Voltage Rating (DC)=50V, Width=0.031inch
R5 R21: library part "R0603 10K", "SMD Chip Resistor, 10 kOhm, ± 1%, 100 mW, 0603 [1608 Metric], Thick Film, Anti-Sulfur", Case Code (Imperial)=0603, Case Code (Metric)=1608, Manufacturer=Yageo, Manufacturer Part Number=AF0603FR-0710KL, Max Operating Temperature=155°C, Max Power Dissipation=100mW, Min Operating Temperature=-55°C, Package Quantity=1, Supplier Part Number 1=603-AF0603FR-0710KL, Temperature Coefficient=100ppm/°C, Tolerance=1%, Voltage Rating=50V, Case/Package=0603, Category="Chip SMD Resistors", Features="Moisture Resistant,Anti-Sulfur", Height=0.022inch, Lead Free=5697LeadFree, Length=0.063inch, Number of Terminations=2, Packaging="Tape and Reel", Power Rating=100mW, Pricing 3="5000=0.00223, 10000=0.00219, 20000=0.00213 (USD)", RoHS=Yes, RoHS Compliant=Yes, Series=AF, Stock 3=5000, Supplier 1=Mouser, Supplier 2=Mouser, Supplier Part Number 2=667-ERJ-3EKF1002V, Termination=SMD/SMT, Width=0.031inch
R9 R12: library part "R0603 220K", "RES 0603 220K OHM 1% 1/10W", Case Code (Imperial)=0603, Case Code (Metric)=1608, Manufacturer 1=Yageo, Manufacturer Part Number 1=RC0603FR-07220KL, Max Operating Temperature=155°C, Max Power Dissipation=100mW, Min Operating Temperature=-55°C, Package Quantity=1, Resistance=220kR, Resistance Tolerance=1%, Resistor Type="Thick Film", Supplier Part Number 1=603-RC0603FR-07220KL, Temperature Coefficient=100ppm/°C, Voltage Rating=50V, Case/Package=0603, Category="Chip SMD Resistors", Depth=0.8mm, Features="Moisture Resistant", Height=0.022inch, Lead Free="Lead Free", Length=0.063inch, Number of Pins=2, Number of Terminations=2, Packaging="Tape and Reel", Power Rating=100mW, Pricing 1="1=0.10000, 10=0.02400, 50=0.02400, 100=0.01000, 1000=0.00400, 10000=0.00300 (USD)", REACH SVHC="No SVHC", RoHS=Yes, RoHS Compliant=Yes, Series=RC, Size Code=0603, Stock 1=155701, Supplier 1=Mouser, Technology="THICK FILM", Termination=SMD/SMT, Tolerance=1%, Voltage Rating (DC)=50V, Width=0.031inch
R10 R11: library part "R0603 5.1K", "RES 0603 5.1K OHM 1% 1/10W", Case Code (Imperial)=0603, Case Code (Metric)=1608, Manufacturer=Yageo, Manufacturer Part Number=RC0603FR-075K1L, Max Operating Temperature=155°C, Max Power Dissipation=100mW, Min Operating Temperature=-55°C, Package Quantity=1, Resistance=5.1kR, Resistor Type="Thick Film", Supplier Part Number 1=603-RC0603FR-075K1L, Temperature Coefficient=100ppm/°C, Tolerance=1%, Voltage Rating=50V, Case/Package=0603, Category="Chip SMD Resistors", Depth=0.8mm, Features="Moisture Resistant", Height=0.022inch, Lead Free="Lead Free", Length=0.063inch, Military Standard=Not, Number of Pins=2, Number of Terminations=2, Packaging="Tape and Reel", Power Rating=100mW, REACH SVHC="No SVHC", RoHS=Yes, Stock 1=557916, Supplier 1=Mouser, Termination=SMD/SMT, Voltage Rating (DC)=50V, Width=0.031inch
R18 R20: library part "R0603 510K", "RES 0603 510K OHM 1% 1/10W", Case Code (Imperial)=0603, Case Code (Metric)=1608, Manufacturer="TE Connectivity", Manufacturer Part Number=CPF0603B510KE, Max Operating Temperature=155°C, Max Power Dissipation=63mW, Min Operating Temperature=-55°C, Resistance=510kR, Supplier Part Number 1=279-CPF0603B510KE, Temperature Coefficient=25ppm/°C, Tolerance=0.1%, Case/Package=0603, Category=Uncategorized, Number of Terminations=2, Packaging="Cut Tape", Pricing 1="1=0.49, 10=0.329, 50=0.329, 100=0.187, 1000=0.1, 10000=0.092 (USD)", RoHS=Yes, RoHS Compliant=Yes, Series="CPF, Neohm", Stock 1=16357, Supplier 1=Mouser
R22: library part "R0603 1M", "RES 0603 1M OHM 1% 1/10W", Case Code (Imperial)=0603, Case Code (Metric)=1608, Manufacturer 1=Yageo, Manufacturer Part Number 1=RC0603FR-071ML, Max Operating Temperature=155°C, Min Operating Temperature=-55°C, Package Quantity=5000, Power Rating=100mW, Resistance=1MR, Resistor Type="Thick Film", Supplier Part Number 1=603-RC0603FR-071ML, Temperature Coefficient=100ppm/°C, Tolerance=1%, Voltage Rating=75V, Voltage Rating (DC)=50V, Application(s)="HIGH RELIABILITY", Case/Package=0603, Category="Chip SMD Resistors", Depth=0.8mm, Height=0.45mm, Lead Free="Lead Free", Length=1.6mm, Military Standard=Not, Number of Pins=2, Packaging="Cut Tape", Pricing 1="1=0.10000, 10=0.01800, 50=0.01800, 100=0.00700, 1000=0.00400, 10000=0.00200 (USD)", REACH SVHC="No SVHC", RoHS=Yes, RoHS Compliant=Yes, Series=RC, Stock 1=1321822, Supplier 1=Mouser, Technology="THICK FILM", Termination=SMD/SMT, Type="General Purpose", Weight=0.000847oz, Width=0.8mm
R23: library part "R0603 2M", "RES 0603 2M OHM 1% 1/10W", Manufacturer 1=Vishay, Manufacturer Part Number 1=CRCW06032M00FKEAC, Supplier Part Number 1=71-CRCW06032M00FKEAC, Category="Chip SMD Resistors", Pricing 1="1=0.10000, 10=0.04300, 50=0.04300, 100=0.01800, 1000=0.00900, 10000=0.00500 (USD)", RoHS=Yes, RoHS Compliant=Yes, Stock 1=40195, Supplier 1=Mouser, Supplier 2=Digi-Key, Supplier Part Number 2=541-5333-1-ND
S1 S2: "Switch Tactile OFF (ON) SPST Round Button Gull Wing 0.05A 24VDC 1.57N SMD T/R", Case/Package=SMD/SMT, Contact Current Rating=20mA, Contact Resistance=100mR, Manufacturer="TE Connectivity Alcoswitch", Max Operating Temperature=85°C, Max Voltage Rating (DC)=15V, Min Operating Temperature=-35°C, Operating Force=1.57N, Package Quantity=4000, Supplier Part Number 1=506-8-1437565-1, Actuator Length=0.4mm, Actuator Material=Brass, Actuator Type=Standard, Category="Pushbutton Switches", ComponentLink1Description=https://datasheet.ciiva.com/8082/eng-cs-1308111-1-switches-core-program-catalog-0308-8082416.pdf?src-supplier=Avnet, ComponentLink1URL=https://datasheet.ciiva.com/8082/eng-cs-1308111-1-switches-core-program-catalog-0308-8082416.pdf?src-supplier=Avnet, Contact Material="Copper Alloy", Contact Plating=Silver, Electrical Life=500000Cycles, ELV=5681ELVCompliant, Height=1.7mm, Illumination Type=Non-Illuminated, Lead Free=5697LeadFree, Manufacturer Part Number=8-1437565-1, Mechanical Life=500000Cycles, Mount="Surface Mount", Number of Positions=2NUMBER, Orientation=Straight, Packaging="Tape and Reel", Pricing 1="1=0.72, 10=0.72, 50=0.72, 100=0.697, 1000=0.567, 10000=0.371 (USD)", Radiation Hardening=No, RoHS=Yes, RoHS Compliant=Yes, Series=FSMCT, Stock 1=20150, Supplier 1=Mouser, Switch Function=Off-Mom, Switch Travel=0.25mm, Termination="Gull Wing", Throw Configuration=SPST, Type=Switch
SW1: "Slide Switch, SPDT, On-on, Latched, 0.2A, 30VDC, Solder Terminal, Panel Mount", Contact Current Rating=200mA, Flammability Rating="UL94 HB", Manufacturer="TE Connectivity AMP", Max Operating Temperature=70°C, Max Voltage Rating (DC)=30V, Min Operating Temperature=-20°C, Operating Force=200gf, Package Quantity=19200, Supplier Part Number 1=655-1825232-1, Actuator Length=0.118inch, Actuator Material=Nylon, Actuator Type=Standard, Category="Slide Switches", ComponentLink1Description=https://datasheet.ciiva.com/15085/eng-cd-1825232-b2-15085854.pdf?src-supplier=Digi-Key, ComponentLink1URL=https://datasheet.ciiva.com/15085/eng-cd-1825232-b2-15085854.pdf?src-supplier=Digi-Key, Contact Material="Copper Alloy", Contact Plating=Silver, Current Rating=200mA, Electrical Life=10000Cycles, ELV=Compliant, Length=0.3563inch, Manufacturer Part Number=1825232-1, Mechanical Life=10000Cycles, Mounting Technology="Through Hole", Number of Positions=2, Orientation="Right Angle", Packaging=Tray, PCB Mount Retention=With, Pricing 1="1=0.4, 10=0.382, 50=0.361, 100=0.321, 1000=0.247, 10000=0.24 (USD)", RoHS=Yes, RoHS Compliant=Yes, Stock 1=12457, Supplier 1=Mouser, Supplier 2=Digi-Key, Supplier Part Number 2=A107673-ND, Switch Function=On-On, Switch Travel=2mm, Tail Length=0.094inch, Termination="PC Pin", Throw Configuration=SPDT, Type=Switch, Voltage Rating (DC)=30V, Width=4.3mm
U1: "IC LI-ION CHARGE MGMT 16-QFN", Battery Pack Voltage=4.2V, Case/Package=VQFN, Manufacturer="Texas Instruments", Max Charge Current=1.5A, Max Operating Temperature=125°C, Max Supply Voltage=6.4V, Min Input Voltage=4.3V, Min Operating Temperature=-40°C, Min Supply Voltage=4.35V, Package Quantity=3000, Supplier Part Number 1=595-BQ24075RGTR, Battery Chemistry=LITHIUM-ION, Category="Battery Management", ComponentLink1Description=https://datasheet.ciiva.com/15114/getdatasheetpartid-471953-15114762.pdf?src-supplier=Verical, ComponentLink1URL=https://datasheet.ciiva.com/15114/getdatasheetpartid-471953-15114762.pdf?src-supplier=Verical, ComponentLink2Description=https://datasheet.ciiva.com/3214/bq24079-3214043.pdf?src-supplier=Avnet, ComponentLink2URL=https://datasheet.ciiva.com/3214/bq24079-3214043.pdf?src-supplier=Avnet, ComponentLink3Description=https://datasheet.ciiva.com/1934/bq24072-1934514.pdf?src-supplier=Digi-Key, ComponentLink3URL=https://datasheet.ciiva.com/1934/bq24072-1934514.pdf?src-supplier=Digi-Key, Contact Plating=Gold, Fault Protection="Over Voltage,Over Temperature,Short Circuit,Reverse Current", Interface=USB, Lead Free="Lead Free", Manufacturer Part Number=BQ24075RGTR, Number of Cells=1, Number of Pins=16, Output Current=1.5A, Output Voltage=4.2V, Packaging="Tape and Reel", Pricing 1="1=2.52000, 10=2.27000, 50=2.14000, 100=1.82000, 1000=1.24000, 10000=1.24000 (USD)", Radiation Hardening=No, RoHS=Yes, RoHS Compliant=Yes, Series=-, Stock 1=21933, Supplier 1=Mouser, Supplier 2=Digi-Key, Supplier 3=Digi-Key, Supplier 4="Arrow Electronics", Supplier Part Number 2=296-38874-1-ND, Supplier Part Number 3=296-38874-2-ND, Supplier Part Number 4=BQ24075RGTR, Weight=0.000808oz
U2: "IC REG LINEAR 3.3V 600MA SOT25", Case/Package=SOT-23-5, Dropout Voltage=250mV, Manufacturer=Diodes, Max Input Voltage=6V, Max Operating Temperature=85°C, Max Output Current=600mA, Min Input Voltage=2.5V, Min Operating Temperature=-40°C, Output Voltage=3.3V, Package Quantity=1, Quiescent Current=55uA, Supplier Part Number 1=621-AP2112K-3.3TRG1, Accuracy=1.5%, Category="Voltage Regulators - Linear", ComponentLink1Description=https://datasheet.ciiva.com/29569/ap2112-29569917.pdf?src-supplier=Digi-Key, ComponentLink1URL=https://datasheet.ciiva.com/29569/ap2112-29569917.pdf?src-supplier=Digi-Key, ComponentLink2Description=https://datasheet.ciiva.com/29569/ap2112-29569918.pdf?src-supplier=Digi-Key, ComponentLink2URL=https://datasheet.ciiva.com/29569/ap2112-29569918.pdf?src-supplier=Digi-Key, ComponentLink3Description=https://datasheet.ciiva.com/29569/ap2112-29569919.pdf?src-supplier=Digi-Key, ComponentLink3URL=https://datasheet.ciiva.com/29569/ap2112-29569919.pdf?src-supplier=Digi-Key, ComponentLink4Description=https://datasheet.ciiva.com/30016/ap2112-30016792.pdf?src-supplier=Avnet, ComponentLink4URL=https://datasheet.ciiva.com/30016/ap2112-30016792.pdf?src-supplier=Avnet, Height=1.3mm, Lead Free="Lead Free", Length=3.1mm, Manufacturer Part Number=AP2112K-3.3TRG1, Mount="Surface Mount", Number of Outputs=1, Number of Pins=5, Number of Regulators=1, Output Current=600mA, Output Type=Fixed, Packaging="Tape and Reel", Polarity=Positive, Pricing 1="1=0.47000, 10=0.31700, 50=0.31700, 100=0.15000, 1000=0.11600, 10000=0.08900 (USD)", RoHS=Yes, RoHS Compliant=Yes, Stock 1=4864, Supplier 1=Mouser, Width=1.7mm
U3: "Load Switch P-Channel 2A SOT-26-6", Case/Package=SOT-26, Current Rating=2A, Manufacturer=Diodes, Max Operating Temperature=85°C, Max Power Dissipation=720mW, Max Supply Voltage=6V, Min Operating Temperature=-40°C, Min Supply Voltage=1.5V, On-State Resistance=210mR, On-state Resistance-Max=100MR, Output Current=0A, Package Quantity=3000, Supplier Part Number 1=621-AP2281-1WG-7, Category="Hot Swap Controllers", Interface=On/Off, Lead Free="Lead Free", Manufacturer Part Number=AP2281-1WG-7, Max Output Current=2A, Mount="Surface Mount", Number of Outputs=1, Number of Pins=6, Output Configuration="High Side", Packaging="Tape and Reel", Power Dissipation=720mW, Pricing 1="1=0.66000, 10=0.57900, 50=0.57900, 100=0.44400, 250=0.41200, 500=0.35100, 1000=0.28100, 3000=0.25400, 6000=0.23900, 9000=0.23700, 10000=0.23700 (USD)", Radiation Hardening=No, Rated Current-Max=2A, REACH SVHC="No SVHC", RoHS=Yes, RoHS Compliant=Yes, Series=-, Stock 1=4712, Supplier 1=Mouser, Supplier 2=LCSC, Supplier Part Number 2=C127279
U4 U5: library part TPS63030DSKR, "Buck-Boost Switching Regulator IC Positive Adjustable 1.2V 1 Output 900mA (Switch) 10-WFDFN Exposed Pad", Case/Package=SON, Manufacturer 1="Texas Instruments", Max Operating Temperature=85°C, Max Output Current=800mA, Max Output Voltage=5.5V, Min Input Voltage=1.8V, Min Operating Temperature=-40°C, Min Output Voltage=1.2V, Package Quantity=3000, Quiescent Current=25uA, Supplier Part Number 1=595-TPS63030DSKR, Supply Current=50uA, Switching Frequency=2.4MHz, Category="Voltage Regulators - Switching", Efficiency=96%, Lead Free="Lead Free", Manufacturer Part Number 1=TPS63030DSKR, Max Supply Voltage=5.5V, Min Supply Voltage=1.8V, Mounting Technology="Surface Mount", Number of Outputs=1, Operating Supply Voltage=5.5V, Output Configuration=Positive, Output Current=800mA, Output Type=Adjustable, Output Voltage=5.5V, Packaging="Tape and Reel", Pins=10, Pricing="1=1.91, 10=1.64, 50=1.64, 100=1.41, 1000=1.01, 10000=0.886 (USD)", Radiation Hardening=No, Reach SVHC Compliant=No, RoHS=Yes, RoHS Compliant=Yes, Series=-, Stock=10596, Supplier 1=Mouser, Supplier 2=LCSC, Supplier Part Number 2=C12462, Synchronous Rectifier=Yes, Topology=Buck-Boost
USB: "Usb C Rec Gf Ra 6P SMT & SMT She", Manufacturer 1="Global Connector Technology", Manufacturer Part Number 1=USB4135-GF-A, Supplier Part Number 1=640-USB4135-GF-A, Category=Connectors, Pricing 1="1=0.67300, 50=0.59700, 100=0.56000, 250=0.52200, 500=0.46600, 1000=0.43300, 1500=0.40000, 3000=0.33600 (USD)", RoHS=No, Stock 1=1196, Supplier 1=Mouser

## Via types
v1: diameter 27.56, hole 13.78, Top Layer to Bottom Layer, tented both sides, 109 vias
v2: diameter 19.68/19.68 (per signal layer), hole 11.81, Top Layer to Bottom Layer, 8 vias

## Nets (pads, with @x,y where several pads share a name; then routed paths per layer and width w, separated by ;. In a path a pad name is that pad's centre, name@x,y a point inside that pad or via, vN(x,y) a via of type N, cw(c..) or ccw(c..) an arc to the next point about the centre after c; other vN are vias at no path point)
3V3: 3V3.1 C7.1 C8.1 C9.1 P1.1 P2.1 P3.3 P3.5 R9.2 U4.1 | length 3105.9
  Top Layer w10: C7.1@1579.88,579.53 1586.3,585.95 1586.3,635.32 1586.61,635.63 U4.1
  Top Layer w22: P2.1 375,196.59 421.59,150 700,150 825,275 1000,275 P3.5 ; R9.2@1579.88,501.22 C7.1 v1(1600,575) 3V3.1@1648.23,575 ; R9.2 C9.1 C8.1 v1(1700,575)
  Top Layer w40: P3.5 P3.3
  Bottom Layer w22: P3.3 1225,400 1675,400 1700,425 v1(1700,575) ; v1(1600,575) 1650,575 ; v1(1650,525) 1650,575 ; P1.1 2050,375 2050,612.11 2037.11,625 1850,625 1800,575 v1(1700,575) ; 1650,575 v1(1700,575)
  Bottom Layer w40: P3.5 P3.3
3V3_PWR_CTRL: J7.2 R7.2 U4.6 | length 628.4
  Top Layer w10: R7.2 1496.9,750 1502.76,744.14 U4.6 1502.44,714.69 1478.29,714.69 1470.9,722.08 v1(1466.14,722.08) ; v1(1475,525) 1475,387.89 1487.89,375 1560.61,375 1573.5,362.11 1573.5,326.5 J7.2
  Bottom Layer w10: v1(1466.14,722.08) 1466.14,535.36 1475,526.5 v1(1475,525)
5V: 5V.1 C11.1 C12.1 C13.1 P1.4 P2.4 P3.7 P3.9 R12.2 U5.1 | length 3334.5
  Top Layer w10: U5.1 1213.06,564.37 1213.37,564.69 1213.37,618.25 C11.1
  Top Layer w22: P3.7 1025,400 1300,400 1325,375 1325,200 1375,150 1675,150 1725,200 P1.4 ; v1(1100,625) C12.1 C13.1 R12.2 ; 5V.1@1146.22,625 5V.1 v1(1200,625) C11.1 R12.2@1220.12,698.78
  Top Layer w40: P3.9 P3.7
  Bottom Layer w22: P2.4 75,400 150,475 700,475 P3.9 ; P3.7 950,587.11 987.89,625 1150,625 ; v1(1150,675) 1150,625 ; v1(1200,625) 1150,625
  Bottom Layer w40: P3.9 P3.7
5V_PWR_CTRL: J8.2 R16.2 U5.6 | length 496.2
  Top Layer w10: U5.6 1297.24,484.32 1297.24,454.69 1301.93,450 R16.2@1365.12,450 ; R16.2 1368.9,330.08 1423.97,275 1569.14,275 1575,269.14 J8.2
BATT_THERMAL_SENSE: J1.1 NTC.1 U1.1 | length 372.2
  Top Layer w10: U1.1 829.53,1095.47 858,1067 J1.1
  Top Layer w22: J1.1 859.5,998.5 859.5,966.34 872.39,953.45 971.55,953.45 NTC.1
GND: BATT.1 C1.2 C2.2 C3.2 C4.2 C5.2 C6.2 C8.2 C9.2 C10.2 C12.2 C13.2 GND.1 J2.2 J4.1 J6.1 P3.2 P3.4 P3.6 P3.8 P3.10 Q1.2 Q2.2 R2.1 R3.1 R4.1 R5.1 R7.1 R10.1 R11.1 R13.1 R14.1 R16.1 R19.1 R20.1 R22.1 R23.1 SW1.MH1 SW1.MH2 U1.4 U1.6 U1.8 U1.14 U1.15 U1.17 U2.2 U3.2 U3.5 U4.3 U4.9 U4.11 U5.3 U5.9 U5.11 USB.A12 USB.B12 USB.S1 USB.S2 USB.S3 USB.S4 VO1.2 VO2.2 VO3.2 VO4.2
  other v1: 50,95 130,95 210,95 1890,95 1970,95 330,175 810,175 890,175 1210,175 1290,175 1770,175 50,255 130,255 1810,255 730,335 210,415 850,415 1810,415 90,495 890,495 1850,495 1930,495 50,575 370,575 530,575 850,575 90,655 170,655 250,655 210,735 1890,735 1970,735 170,815 1610,815 2010,815 1330,895 1050,975 1130,975 2010,975 770,1055 930,1055 1010,1055 1090,1055 1170,1055 700,1125 1210,1135 1290,1135 1450,1135 1530,1135 210,1215 370,1215 930,1215 1010,1215 1090,1215 1170,1215
  other v2: 1250,495.47 1236.22,525 1263.78,525 1250,554.53 1550,645.47 1536.22,675 1563.78,675 1550,704.53
NetBUTTONS_1: BUTTONS.1 J3.2 S1.3 S1.4 | length 484.3
  Top Layer w22: S1.4@1651.18,1050 1651.38,1050.2 1774.8,1050.2 1775,1050 J3.2 ; 1775,1050.2 2000.2,1050.2 BUTTONS.1
NetBUTTONS_2: BUTTONS.2 J5.2 S2.3 S2.4 | length 901
  Top Layer w22: S2.4 1399.8,1050.2 ; J5.2 1400,1050 1399.8,1050.2 ; BUTTONS.2 1975,1175 1925,1125 1612.6,1125 1537.8,1050.2 S2.3 1399.8,1050.2
NetC7_2: C7.2 R9.1 R22.2 U4.10 | length 222.8
  Top Layer w10: U4.10 1513.29,635.63 1513.6,635.32 1513.6,581.51 C7.2
  Top Layer w22: R22.2 R9.1 ; R9.1@1520.12,501.22 C7.2
NetC11_2: C11.2 R12.1 R23.2 U5.10 | length 218.5
  Top Layer w10: C11.2 1286.61,618.27 1286.61,564.69 1286.93,564.37 U5.10@1293.46,564.37
  Top Layer w22: C11.2 R12.1@1279.88,700 ; R12.1 R23.2@1281.1,773.43
NetD1_2: D1.2 R15.2 | length 84.4
  Top Layer w22: D1.2 700,508.46 700,456.1 R15.2
NetD4_2: D4.2 R8.2 | length 76
  Top Layer w22: D4.2 267.72,798.82 267.72,726.18 R8.2
NetJ1_2: J1.2 R5.2 | length 51.9
  Top Layer w22: J1.2 R5.2
NetJ2_1: J2.1 R15.1 | length 51.9
  Top Layer w22: J2.1 R15.1
NetJ3_1: J3.1 R13.2 | length 59.9
  Top Layer w22: R13.2 J3.1
NetJ3_3: J3.3 R1.1 | length 59.9
  Top Layer w22: J3.3 R1.1
NetJ4_2: J4.2 S1.1 S1.2 | length 598.2
  Top Layer w22: S1.1 1651.08,1199.9 1774.9,1199.9 v1(1775,1200) 1775.1,1199.9 1898.92,1199.9 S1.2 ; J4.2 v1(1775,900)
  Bottom Layer w22: v1(1775,900) v1(1775,1200)
NetJ5_1: J5.1 R14.2 | length 59.9
  Top Layer w22: R14.2 J5.1
NetJ5_3: J5.3 R6.1 | length 59.9
  Top Layer w22: J5.3 R6.1
NetJ6_2: J6.2 S2.1 S2.2 | length 598.2
  Top Layer w22: S2.1 1276.08,1199.9 1399.9,1199.9 v1(1400,1200) 1400.1,1199.9 1523.92,1199.9 S2.2 ; J6.2 v1(1400,900)
  Bottom Layer w22: v1(1400,900) v1(1400,1200)
NetJ7_1: J7.1 P5.1 | length 91
  Top Layer w22: P5.1 J7.1
NetJ8_1: J8.1 P5.2 | length 91
  Top Layer w22: P5.2 J8.1
NetJ9_2: J9.2 Q3.3 R18.2 | length 199.7
  Top Layer w22: J9.2 706.57,758 725,739.57 Q3.3 721.95,728.64 721.95,653.05 R18.2
NetL1_1: L1.1 U4.4 | length 138.3
  Top Layer w10: U4.4 1669.14,694.68 1676.85,702.39 1676.85,728.62 1691.54,743.31 L1.1@1700,743.31
NetL1_2: L1.2 U4.2 | length 100.6
  Top Layer w10: U4.2 1695.87,655.32 L1.2@1697.24,656.69
NetL2_1: L2.1 U5.4 | length 164.4
  Top Layer w10: L2.1 1108.46,456.69 1124.15,472.38 1124.15,500.63 1128.84,505.32 U5.4
NetL2_2: L2.2 U5.2 | length 128.3
  Top Layer w10: L2.2 1076.38,544.68 U5.2
NetP1_2: P1.2 P1.3 VO1.1 VO2.1 | length 649.7
  Top Layer w40: P1.3 P1.2
  Bottom Layer w22: VO1.1 1985,215 1925,275 P1.2 1925,425 1985,485 VO2.1
  Bottom Layer w40: P1.3 P1.2
NetP2_2: P2.2 P2.3 VO3.1 VO4.1 | length 624
  Top Layer w22: VO3.1 250,175 250,250 275,275 P2.2 275,450 240,485 VO4.1
  Top Layer w40: P2.3 P2.2
  Bottom Layer w40: P2.3 P2.2
NetP6_1: P6.1 Q1.3 R17.1 | length 224.1
  Top Layer w22: Q1.3 543.21,293.31 556.1,306.19 556.1,325 ; R17.1 556.1,325 ; P6.1 556.1,325
NetP6_2: P6.2 R18.1 R20.2 | length 586
  Top Layer w22: P6.2 725,225 775,275 775,643.9 R18.1 R20.2
NetQ1_1: Q1.1 R8.1 U1.9 | length 1457.1
  Top Layer w10: v1(606.78,1175) 605.86,1174.08 605.86,1154.53 U1.9
  Top Layer w20: R8.1@325,718.9 325,425 343.63,406.37 413.54,406.37 452.91,366.99 452.91,216.38 Q1.1
  Top Layer w22: R8.1@325,718.9 R8.1 372.65,725 385.54,737.89 385.54,788.23 v1(386.6,789.3)
  Bottom Layer w22: v1(386.6,789.3) 386.6,816.66 479,909.06 479,963.84 491.89,976.72 668.89,976.72 681.78,989.61 681.78,1063.16 663.16,1081.78 619.67,1081.78 606.78,1094.67 v1(606.78,1175)
NetQ2_3: Q2.3 Q3.1 R21.1 | length 201.4
  Top Layer w22: R21.1 R21.1@759.45,896.65 ; Q3.1 759.25,821.46 759.25,896.46 R21.1@759.45,896.65 ; Q2.3 871.65,896.65 R21.1@759.45,896.65
NetR2_2: R2.2 SW1.2 U3.3 | length 688.2
  Top Layer w22: SW1.2 v1(150,875) ; R2.2@537.4,712.4 537.4,750 ; U3.3 537.4,750 ; R2.2 R2.2@543.9,712.4 ; v1(575,750) 537.4,750
  Bottom Layer w22: SW1.2 v1(150,875) 175,875 300,750 v1(575,750)
NetR3_2: R3.2 U1.12 | length 159.8
  Top Layer w10: R3.2 556.1,1056.1 595.47,1095.47 U1.12
NetR4_2: R4.2 U1.16 | length 74.5
  Top Layer w10: U1.16 729.53,1014.37 R4.2
NetR10_2: R10.2 USB.B5 | length 380.9
  Top Layer w22: v1(250,1175) 250,1173.5 255.32,1168.18 USB.B5 ; v1(300,950) 300,993.9 R10.2
  Bottom Layer w22: v1(250,1175) 321,1104 321,971 v1(300,950)
NetR11_2: R11.2 USB.A5 | length 368.9
  Top Layer w22: USB.A5 294.68,1168.18 300,1173.5 v1(300,1175) ; v1(350,950) 350,981.1 R11.2
  Bottom Layer w22: v1(300,1175) 350,1125 v1(350,950)
VBAT: BATT.2 C3.1 J9.1 Q3.2 R21.2 U1.2 U1.3 VBAT.1 | length 1146.1
  Top Layer w10: U1.2 790.16,1115.16 800,1125 ; U1.3 790.16,1134.84 800,1125 ; C3.1 875,1170.12 875,1126.5 v1(875,1125) ; BATT.2 1007.28,1125 v1(925,1125) v1(875,1125) ; 800,1125 v1(825,1125) v1(875,1125)
  Top Layer w22: J9.1 626.5,793.5 670.67,793.5 687.6,810.43 Q3.2 690.75,821.46 v1@690.75,875 ; R21.2 698.94,894.96 698.94,876.06 v1(700,875) ; v1@875,1126.5 879.88,1131.39 C3.1 879.88,1179.33 875,1184.21 VBAT.1
  Bottom Layer w22: v1(700,875) 825,875 873.94,923.94 873.94,1123.94 v1(875,1125) ; v1(825,1125) v1(875,1125) ; v1(925,1125) v1(875,1125)
VCC: C4.1 C6.1 C10.1 J7.3 J8.3 Q2.1 R19.2 U2.1 U2.3 U3.1 U4.5 U4.7 U4.8 U5.5 U5.7 U5.8 VCC.1 | length 3560.8
  Top Layer w10: U5.5 1202.76,468.46 v1(1221.22,450) ; U5.7 U5.8 C10.1 ; C6.1 U4.8 U4.7 ; v1(1577.76,754.53) 1597.24,735.04 U4.5
  Top Layer w22: U2.3 412.6,537.4 431.31,518.69 468.69,518.69 487.4,537.4 U2.1 487.4,637.6 462.6,662.4 ; v1(425,718.22) v1(425,675) 426.06,673.94 451.06,673.94 462.6,662.4 ; U3.1 v1(462.6,718.11) 462.6,662.4 ; v1(800,700) 801.06,701.06 821.54,701.06 840.75,720.28 R19.2@840.75,728.15 ; Q2.1 840.75,803.54 R19.2@840.75,728.15 ; R19.2 R19.2@840.75,728.15 ; VCC.1@1350,593.17 VCC.1 VCC.1@1350,606.83 ; v1@1369.05,574.11 1369.05,569.68 v1(1370.12,568.61) ; C10.1 v1(1370.12,568.61) ; v1@1428.82,627.31 v1(1370.12,568.61) ; v1(1429.88,628.63) C6.1 ; J8.3 J7.3 1609,337.5 1663.96,392.46 1663.96,433.91 v1(1665.03,434.97)
  Top Layer w30: v1(1000,775) v1(975,800) v1(1000,825) 1025,850 1282.43,850 1325,807.43 1325,629.67 1347.84,606.83 VCC.1@1350,606.83 ; VCC.1@1350,593.17 v1@1369.05,574.11